# EAGLE board module_template_misc (EAGLE 5.10)

Size 100 x 75 mm. Coordinates in mm from the lower left corner, seen from the top.
Outline: 0,0 100,0 100,75 0,75 0,0
Copper layers (1*16): Top 0.035mm / dielectric 1.5mm / Bottom 0.035mm
Design rules "default": minimum track width 10mil, minimum drill 24mil, track to track 8mil, track to pad 8mil, pad to pad 8mil, via to via 8mil, smd to smd 8mil, copper to edge 40mil, drill to drill 8mil, minimum pad ring 10mil, minimum via ring 8mil, stop-mask expansion 4mil, vias tented up to drill 0mil, thermal gap 10mil
Net classes: 0 Signal: width 0.305 mm, drill 0.508 mm, clearance 0.203 mm; 1 LoVolt42: width 0.61 mm, drill 0.508 mm, clearance 0.813 mm to class 0, clearance 0.305 mm; 2 MedVolt100: width 0.61 mm, drill 0.508 mm, clearance 1.626 mm to class 0, clearance 1.626 mm to class 1, clearance 0.813 mm; 3 LineVolt350: width 0.813 mm, drill 0.508 mm, clearance 12.7 mm to class 0, clearance 12.7 mm to class 1, clearance 12.7 mm to class 2, clearance 2.54 mm

## Footprints (pad centres in the part's own frame; a part is rotated, then mirrored left to right if it is on the bottom)
ML64L = drill 0.914 pad 1.6 offset: 1 -39.37,-1.27; 2 -39.37,1.27; 3 -36.83,-1.27; 4 -36.83,1.27; 5 -34.29,-1.27; 6 -34.29,1.27; 7 -31.75,-1.27; 8 -31.75,1.27; 9 -29.21,-1.27; 10 -29.21,1.27; 11 -26.67,-1.27; 12 -26.67,1.27; 13 -24.13,-1.27; 14 -24.13,1.27; 15 -21.59,-1.27; 16 -21.59,1.27; 17 -19.05,-1.27; 18 -19.05,1.27; 19 -16.51,-1.27; 20 -16.51,1.27; 21 -13.97,-1.27; 22 -13.97,1.27; 23 -11.43,-1.27; 24 -11.43,1.27; 25 -8.89,-1.27; 26 -8.89,1.27; 27 -6.35,-1.27; 28 -6.35,1.27; 29 -3.81,-1.27; 30 -3.81,1.27; 31 -1.27,-1.27; 32 -1.27,1.27; 33 1.27,-1.27; 34 1.27,1.27; 35 3.81,-1.27; 36 3.81,1.27; 37 6.35,-1.27; 38 6.35,1.27; 39 8.89,-1.27; 40 8.89,1.27; 41 11.43,-1.27; 42 11.43,1.27; 43 13.97,-1.27; 44 13.97,1.27; 45 16.51,-1.27; 46 16.51,1.27; 47 19.05,-1.27; 48 19.05,1.27; 49 21.59,-1.27; 50 21.59,1.27; 51 24.13,-1.27; 52 24.13,1.27; 53 26.67,-1.27; 54 26.67,1.27; 55 29.21,-1.27; 56 29.21,1.27; 57 31.75,-1.27; 58 31.75,1.27; 59 34.29,-1.27; 60 34.29,1.27; 61 36.83,-1.27; 62 36.83,1.27; 63 39.37,-1.27; 64 39.37,1.27
3,2 = hole 3.2: 0,0

## Placement (x,y rotation side)
BACKPLANE  [ML64L]  49.53,69.85 0 top
U$1  [3,2]  4,4 0 top
U$2  [3,2]  4,67 0 top
U$3  [3,2]  96,67 0 top
U$4  [3,2]  96.19,4 0 top

## Library data of the parts
BACKPLANE = con-ml
U$1-U$4 = holes

## Nets
+5V: BACKPLANE.2 BACKPLANE.64
/BOOT: BACKPLANE.62
/BUSREAD: BACKPLANE.29
/HALT: BACKPLANE.56
/MME_H: BACKPLANE.28
/MME_L: BACKPLANE.27
/RESET: BACKPLANE.61
A0: BACKPLANE.11
A1: BACKPLANE.12
A2: BACKPLANE.13
A3: BACKPLANE.14
A4: BACKPLANE.15
A5: BACKPLANE.16
A6: BACKPLANE.17
A7: BACKPLANE.18
A8: BACKPLANE.19
A9: BACKPLANE.20
A10: BACKPLANE.21
A11: BACKPLANE.22
A12: BACKPLANE.23
A13: BACKPLANE.24
A14: BACKPLANE.25
A15: BACKPLANE.26
BUSWRITE: BACKPLANE.30
D0: BACKPLANE.3
D1: BACKPLANE.4
D2: BACKPLANE.5
D3: BACKPLANE.6
D4: BACKPLANE.7
D5: BACKPLANE.8
D6: BACKPLANE.9
D7: BACKPLANE.10
GND: BACKPLANE.1 BACKPLANE.63
INT: BACKPLANE.31
IRQ0: BACKPLANE.33
IRQ1: BACKPLANE.34
IRQ2: BACKPLANE.35
IRQ3: BACKPLANE.36
IRQ4: BACKPLANE.37
IRQ5: BACKPLANE.38
IRQ6: BACKPLANE.39
IRQ7: BACKPLANE.40
IVR: BACKPLANE.32
NC_0: BACKPLANE.41
NC_1: BACKPLANE.42
NC_2: BACKPLANE.43
NC_3: BACKPLANE.44
NC_4: BACKPLANE.45
NC_5: BACKPLANE.46
NC_6: BACKPLANE.47
NC_7: BACKPLANE.48
NC_8: BACKPLANE.49
NC_9: BACKPLANE.50
NC_10: BACKPLANE.51
NC_11: BACKPLANE.52
NC_12: BACKPLANE.53
NC_13: BACKPLANE.54
NC_14: BACKPLANE.55
SYSCK_DE: BACKPLANE.58
SYSCK_EX: BACKPLANE.59
SYSCK_FE: BACKPLANE.57
SYSCK_WB: BACKPLANE.60

## Tracks (layer width: path | path; a pad name or v marks a point on that pad's centre or on a via)
+5V  (1 unrouted)
GND  (1 unrouted)

## Text on the board
Bottom: MODULE_NAME VER